# EAGLE board Jasmine (EAGLE 7.7.0)
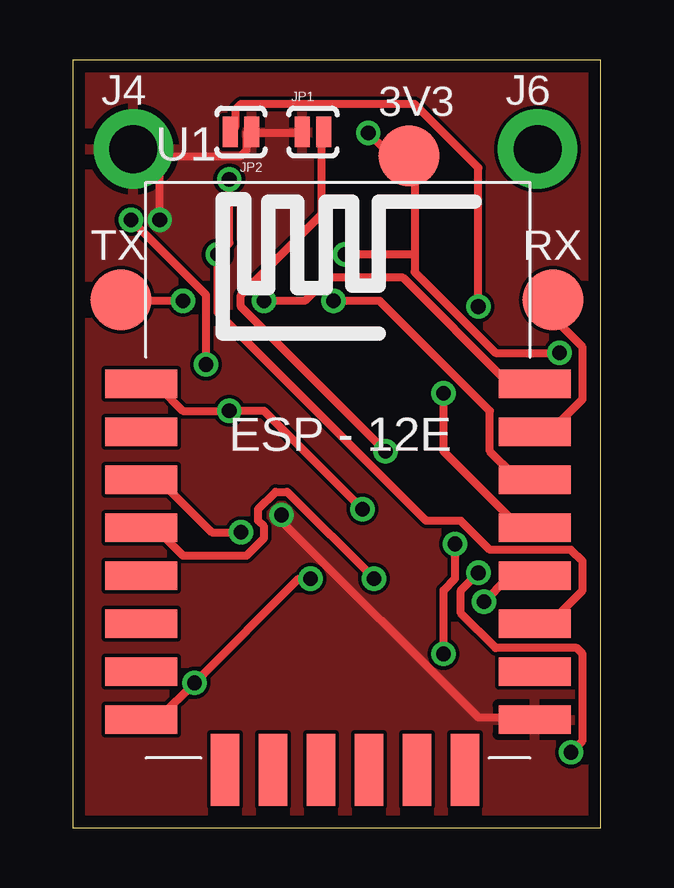
[diagram p0: board, top side]
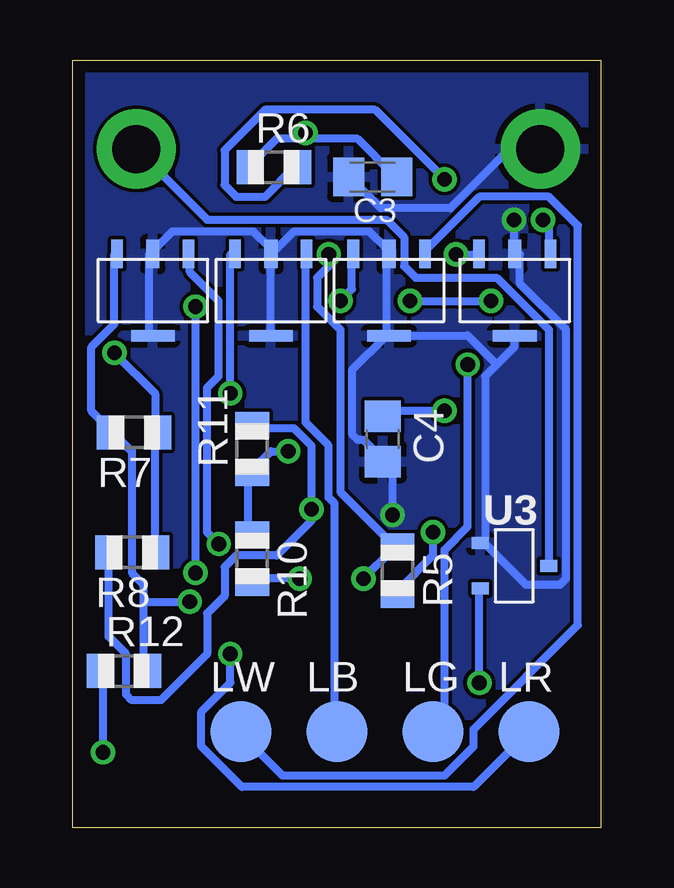
[diagram p1: board, bottom side, seen from below]

Size 22 x 32 mm. Coordinates in mm from the lower left corner, seen from the top.
Outline: 0,0 22,0 22,32 0,32 0,0
Copper layers (1*16): Top 0.035mm / dielectric 1.5mm / Bottom 0.035mm
Design rules "default *": minimum track width 13mil, minimum drill 24mil, track to track 6mil, track to pad 6mil, pad to pad 6mil, via to via 6mil, smd to smd 6mil, copper to edge 20mil, drill to drill 8mil, minimum pad ring 10mil, minimum via ring 8mil, stop-mask expansion 4mil, vias tented up to drill 0mil, thermal gap 10mil

## Footprints (pad centres in the part's own frame; a part is rotated, then mirrored left to right if it is on the bottom)
B2,54 = smd 2.54 x 2.54: TP 0,0
C0805K = smd 1.3 x 1.6: 1 -1,0; 2 1,0
C0805 = smd 1.3 x 1.5: 1 -0.95,0; 2 0.95,0
1X01_2MM = drill 2 pad 3.302: 1 0,0
SJ_2S-NO = smd 0.635 x 1.27: 1 -0.45,0; 2 0.45,0
R0805 = smd 1.1 x 1.4: 1 -1,0; 2 1,0
ESP12E-SMD = smd 3 x 1.2: ADC -8.3,3.8; CH_PD -8.3,1.8; GND 8.1,-8.2; GPIO0 8.1,-2.2; GPIO2 8.1,-4.2; GPIO4 8.1,-0.2; GPIO5 8.1,1.8; GPIO12 -8.3,-4.2; GPIO13 -8.3,-6.2; GPIO14 -8.3,-2.2; GPIO15 8.1,-6.2; GPIO16 -8.3,-0.2; RESET -8.3,5.8; RXD0 8.1,3.8; TXD0 8.1,5.8; VCC -8.3,-8.2 | smd 1.2 x 3: CS0 -4.8,-10.3; GPIO9 -0.8,-10.3; GPIO10 1.2,-10.3; MISO -2.8,-10.3; MOSI 3.2,-10.3; SCLK 5.2,-10.3
XC6206_SOT-23 = smd 0.5 x 0.7: 1 -0.95,-1.415; 2 0.95,-1.415; 3 0,1.44
AMC7135_CC_REGULATOR = smd 1.82 x 0.46: GND2 0,1.89 | smd 0.55 x 1.19: GND3 0,-1.525 | smd 0.48 x 1.19: OUT -1.49,-1.525; VDD 1.49,-1.525

## Placement (x,y rotation side)
3V3  TPB2,54  [B2,54]  14,28 0 top
C3  1.0uF  [C0805K]  9.51,27.12 180 bottom
C4  10uF  [C0805]  9.09,16.2 270 bottom
J4  GND  [1X01_2MM]  2.52,28.29 0 top
J6  Vcc  [1X01_2MM]  19.36,28.29 0 top
JP1  RST  [SJ_2S-NO]  10,29 0 top
JP2  BOOT  [SJ_2S-NO]  7,29 180 top
LB  TPB2,54  [B2,54]  11,4 0 bottom
LG  TPB2,54  [B2,54]  7,4 0 bottom
LR  TPB2,54  [B2,54]  3,4 0 bottom
LW  TPB2,54  [B2,54]  15,4 0 bottom
R5  12K  [R0805]  8.47,10.71 270 bottom
R6  12K  [R0805]  13.63,27.53 0 bottom
R7  12K  [R0805]  19.45,16.47 180 bottom
R8  12K  [R0805]  19.53,11.47 180 bottom
R10  0R  [R0805]  14.53,11.21 270 bottom
R11  470R  [R0805]  14.53,15.78 90 bottom
R12  470R  [R0805]  19.87,6.53 0 bottom
RX  TPB2,54  [B2,54]  20,22 0 top
TX  TPB2,54  [B2,54]  2,22 0 top
U1  ESP-12F  [ESP12E-SMD]  11.14,12.7 0 top
U3  XC6206  [XC6206_SOT-23]  3.61,10.91 270 bottom
U$1  AMC7135_CC_REGULATOR  [AMC7135_CC_REGULATOR]  3.59,22.39 180 bottom
U$2  AMC7135_CC_REGULATOR  [AMC7135_CC_REGULATOR]  18.67,22.39 180 bottom
U$3  AMC7135_CC_REGULATOR  [AMC7135_CC_REGULATOR]  13.75,22.39 180 bottom
U$4  AMC7135_CC_REGULATOR  [AMC7135_CC_REGULATOR]  8.83,22.39 180 bottom

## Library data of the parts
3V3 LB LG LR LW RX TX = testpad
C3 C4 = resistor
J4 J6 = SparkFun-Connectors
JP1 JP2 = SparkFun-Retired
R5-R8 R10-R12 = adafruit
U1 = esp8266modules
U3 = Voltage Regulator
U$1-U$4 = AMC7135_CC_Regulator

## Nets
+3V3: 3V3.TP C3.1 R5.1 R6.1 R7.1 R8.1 U1.VCC U3.2
CH_PD: R5.2 U1.CH_PD
GND: C3.2 C4.2 J4.1 JP1.1 JP2.1 U1.GND U3.1 U$1.GND2 U$1.GND3 U$2.GND2 U$2.GND3 U$3.GND2 U$3.GND3 U$4.GND2 U$4.GND3
GPIO0: R7.2 R12.2 U1.GPIO0 U$2.VDD
GPIO2: R6.2 U1.GPIO2 U$1.VDD
GPIO4: U1.GPIO4 U$3.VDD
GPIO5: U1.GPIO5 U$4.VDD
JMP_BLDR: JP2.2 R12.1
JMP_RESET: JP1.2 R10.1 R11.1
LED_B: LB.TP U$3.OUT
LED_G: LG.TP U$1.OUT
LED_R: LR.TP U$2.OUT
LED_W: LW.TP U$4.OUT
RESET: C4.1 R8.2 R11.2 U1.RESET
RESET_WAKE: R10.2 U1.GPIO16
UART_RX: RX.TP U1.RXD0
UART_TX: TX.TP U1.TXD0
V+: J6.1 U3.3

## Tracks (layer width: path | path; a pad name or v marks a point on that pad's centre or on a via)
+3V3  (via drill 0.61)
  Top 0.33: U1.VCC 2.9,4.58 3.62,4.58 v5.07,6.03 9.41,10.38 v9.89,10.38 | v12.31,28.96 13.03,28.23 13.99,28.23 3V3.TP 14.24,27.99 14.24,23.89 | v20.27,19.79 17.61,19.79 14.24,23.16 14.24,23.89 | 14.24,23.89 v11.34,23.89
  Bottom 0.33: v5.07,6.03 5.07,9.89 U3.2 | v9.89,10.38 8.69,11.58 R5.1 8.69,11.82 10.86,13.99 10.86,20.75 11.82,21.72 11.82,22.92 11.34,23.41 v11.34,23.89 | R8.1 18.58,11.58 18.58,16.41 R7.1 18.58,16.65 18.58,18.1 v20.27,19.79 | 12.31,28.71 10.13,28.71 8.69,27.27 C3.1 | 12.31,28.71 13.51,28.71 14.48,27.75 R6.1 | 12.31,28.71 v12.31,28.96
CH_PD  (via drill 0.61)
  Top 0.33: v7,12.31 5.79,12.31 3.62,14.48 2.9,14.48 U1.CH_PD
  Bottom 0.33: v7,12.31 7,11.34 8.45,9.89 R5.2
GND  (via drill 0.61)
  Top 0.33: JP1.1 9.41,28.96 7.48,28.96 JP2.1 7.24,28.96 7.24,28.23 7,27.99 3.62,27.99 | 3.62,27.99 2.9,27.99 2.65,28.23 J4.1 3.62,27.99 | v8.69,13.03 8.69,12.79 16.89,4.58 19.06,4.58 U1.GND | v3.62,25.34 3.62,27.99
  Bottom 0.33: C3.2 10.38,27.03 9.17,25.82 6.27,25.82 3.86,28.23 2.65,28.23 J4.1 | 4.34,19.3 3.62,20.03 3.62,20.51 U$1.GND2 | 4.34,19.3 4.83,18.82 4.83,12.06 U3.1 4.83,11.82 3.14,10.13 1.69,10.13 1.45,10.38 1.45,20.75 3.38,22.68 3.38,23.89 U$1.GND3 3.62,24.13 v3.62,25.34 | U$2.GND2 18.82,20.51 18.82,23.89 U$2.GND3 18.58,24.13 17.86,24.85 14.48,24.85 13.75,24.13 U$3.GND3 | U$3.GND3 13.75,23.89 U$3.GND2 | 8.93,20.51 8.93,23.89 U$4.GND3 8.93,24.13 9.65,24.85 12.79,24.85 13.51,24.13 U$3.GND3 | 8.93,20.51 10.38,19.06 10.38,16.41 10.13,16.17 9.89,16.17 9.17,15.44 C4.2 8.93,15.2 8.69,14.96 v8.69,13.03 | 8.93,20.51 U$4.GND2 8.69,20.51 5.55,20.51 4.34,19.3
  pour Bottom: 0,32 0,0 22,0 22,32
  pour Top: 0,32 0,0 22,0 22,32
GPIO0  (via drill 0.61)
  Top 0.33: v17.13,9.41 18.1,10.38 19.06,10.38 U1.GPIO0
  Bottom 0.33: U$2.VDD 20.27,23.89 20.27,20.99 21.23,20.03 21.23,17.37 20.51,16.65 R7.2 20.27,16.41 19.55,15.68 19.55,10.62 19.06,10.13 19.06,9.41 | 19.06,9.41 19.06,6.76 R12.2 | 19.06,9.41 v17.13,9.41
GPIO2  (via drill 0.61)
  Top 0.33: U1.GPIO2 19.3,8.69 20.03,8.69 21.23,9.89 21.23,11.1 20.75,11.58 17.37,11.58 16.17,12.79 14.72,12.79 6.03,21.48 v6.03,23.89 6.51,24.37 v6.51,27.03
  Bottom 0.33: v6.03,23.89 5.31,23.89 U$1.VDD | v6.51,27.03 9.41,29.92 13.99,29.92 15.68,28.23 15.68,26.78 15.2,26.3 13.99,26.3 12.79,27.51 R6.2
GPIO4  (via drill 0.61)
  Top 0.33: v15.44,18.1 15.44,15.68 18.58,12.55 19.06,12.55 U1.GPIO4
  Bottom 0.33: v15.44,18.1 15.44,23.89 U$3.VDD
GPIO5  (via drill 0.61)
  Top 0.33: v10.86,21.96 12.79,21.96 17.37,17.37 17.37,15.68 18.34,14.72 19.06,14.72 U1.GPIO5
  Bottom 0.33: v10.86,21.96 10.38,22.44 10.38,23.89 U$4.VDD
JMP_BLDR  (via drill 0.61)
  Top 0.33: v16.89,21.72 16.89,27.51 14.24,30.16 7,30.16 6.76,29.92 6.76,29.2 JP2.2 | v16.89,10.62 16.17,9.89 16.17,8.93 17.61,7.48 20.99,7.48 21.23,7.24 21.23,3.62 v20.75,3.14
  Bottom 0.33: v16.89,10.62 v16.89,21.72 | v20.75,3.14 20.75,6.51 R12.1
JMP_RESET  (via drill 0.61)
  Top 0.33: v13.03,15.68 7,21.72 7,22.2 10.38,25.58 10.38,28.96 JP1.2
  Bottom 0.33: v13.03,15.68 13.75,15.68 14.48,14.96 R11.1 14.72,14.72 14.72,12.31 R10.1
LED_B
  Bottom 0.33: U$3.OUT 12.31,23.89 12.31,16.89 11.34,15.93 11.34,13.75 11.1,13.51 11.1,4.1 LB.TP
LED_G  (via drill 0.61)
  Top 0.33: v2.41,25.34 5.55,22.2 v5.55,19.3
  Bottom 0.33: v2.41,25.34 2.17,25.09 2.17,24.13 U$1.OUT | v5.55,19.3 5.55,12.55 6.51,11.58 6.51,4.58 7,4.1 LG.TP
LED_R  (via drill 0.61)
  Top 0.33: v15.93,11.82 15.93,10.38 15.44,9.89 v15.44,7.24
  Bottom 0.33: v15.93,11.82 16.41,12.31 16.41,18.34 15.93,18.82 15.93,21.96 17.13,23.16 17.13,23.89 U$2.OUT | v15.44,7.24 15.44,6.03 16.65,4.83 16.65,3.38 14.96,1.69 5.31,1.69 3.14,3.86 LR.TP
LED_W
  Bottom 0.33: U$4.OUT 7.24,24.13 5.07,26.3 2.17,26.3 0.96,25.09 0.96,8.45 5.31,4.1 5.31,3.38 6.51,2.17 13.27,2.17 14.96,3.86 LW.TP
RESET  (via drill 0.61)
  Top 0.33: U1.RESET 2.9,18.34 3.62,18.34 4.58,17.37 v6.51,17.37 7.96,17.37 v12.06,13.27
  Bottom 0.33: v6.51,17.37 8.93,17.37 C4.1 | R8.2 20.51,11.34 20.51,7.96 19.79,7.24 19.79,5.55 19.55,5.31 18.34,5.31 16.41,7.24 16.41,8.93 15.68,9.65 15.68,10.86 15.2,11.34 13.51,11.34 12.06,12.79 v12.06,13.27 12.06,15.93 12.79,16.65 14.48,16.65 R11.2
RESET_WAKE  (via drill 0.61)
  Top 0.33: v12.55,10.38 8.93,13.99 8.45,13.99 7.72,13.27 7.72,12.79 7.96,12.55 7.96,12.06 7.24,11.34 4.58,11.34 3.62,12.31 2.9,12.31 U1.GPIO16
  Bottom 0.33: v12.55,10.38 14.48,10.38 R10.2
UART_RX
  Top 0.33: RX.TP 20.03,21.96 20.03,21.23 21.23,20.03 21.23,17.86 20.03,16.65 19.3,16.65 U1.RXD0
UART_TX  (via drill 0.61)
  Top 0.33: v4.58,21.96 2.17,21.96 TX.TP | v7.96,21.96 9.65,21.96 10.62,22.92 13.75,22.92 18.1,18.58 19.06,18.58 U1.TXD0
  Bottom 0.33: v7.96,21.96 v4.58,21.96
V+
  Bottom 0.33: U3.3 2.17,11.1 2.17,20.75 4.34,22.92 7.72,22.92 8.2,23.41 8.2,24.61 8.93,25.34 16.41,25.34 19.3,28.23 J6.1